# Altium PCB PCB1.PcbDoc
Units mm, origin at the board's own origin, x right, y up, seen from the top; angles counter-clockwise.
Board outline 101.71 x 68.07 mm, 2 copper layers (Top Layer, Bottom Layer); 35 components, 54 nets, 166 pads, 4 vias.
Unrouted connection lines stored in the file: 2.
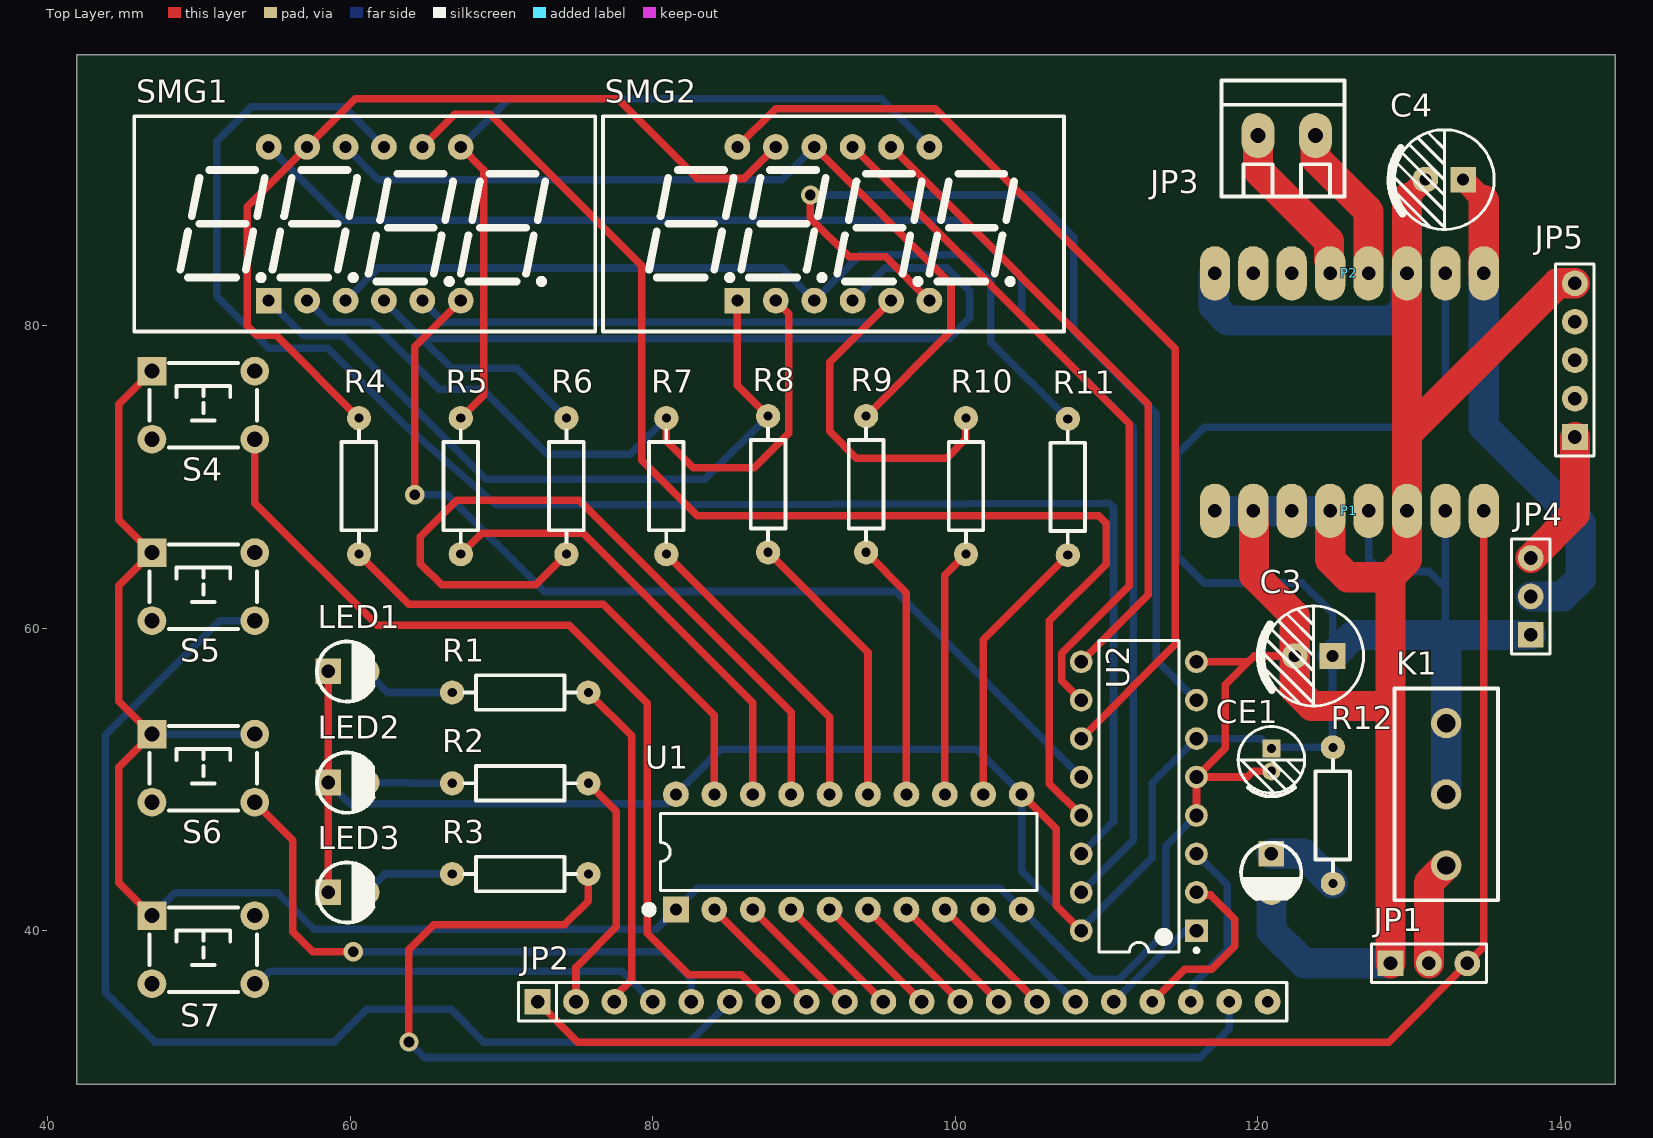
[diagram p0: Top Layer view]
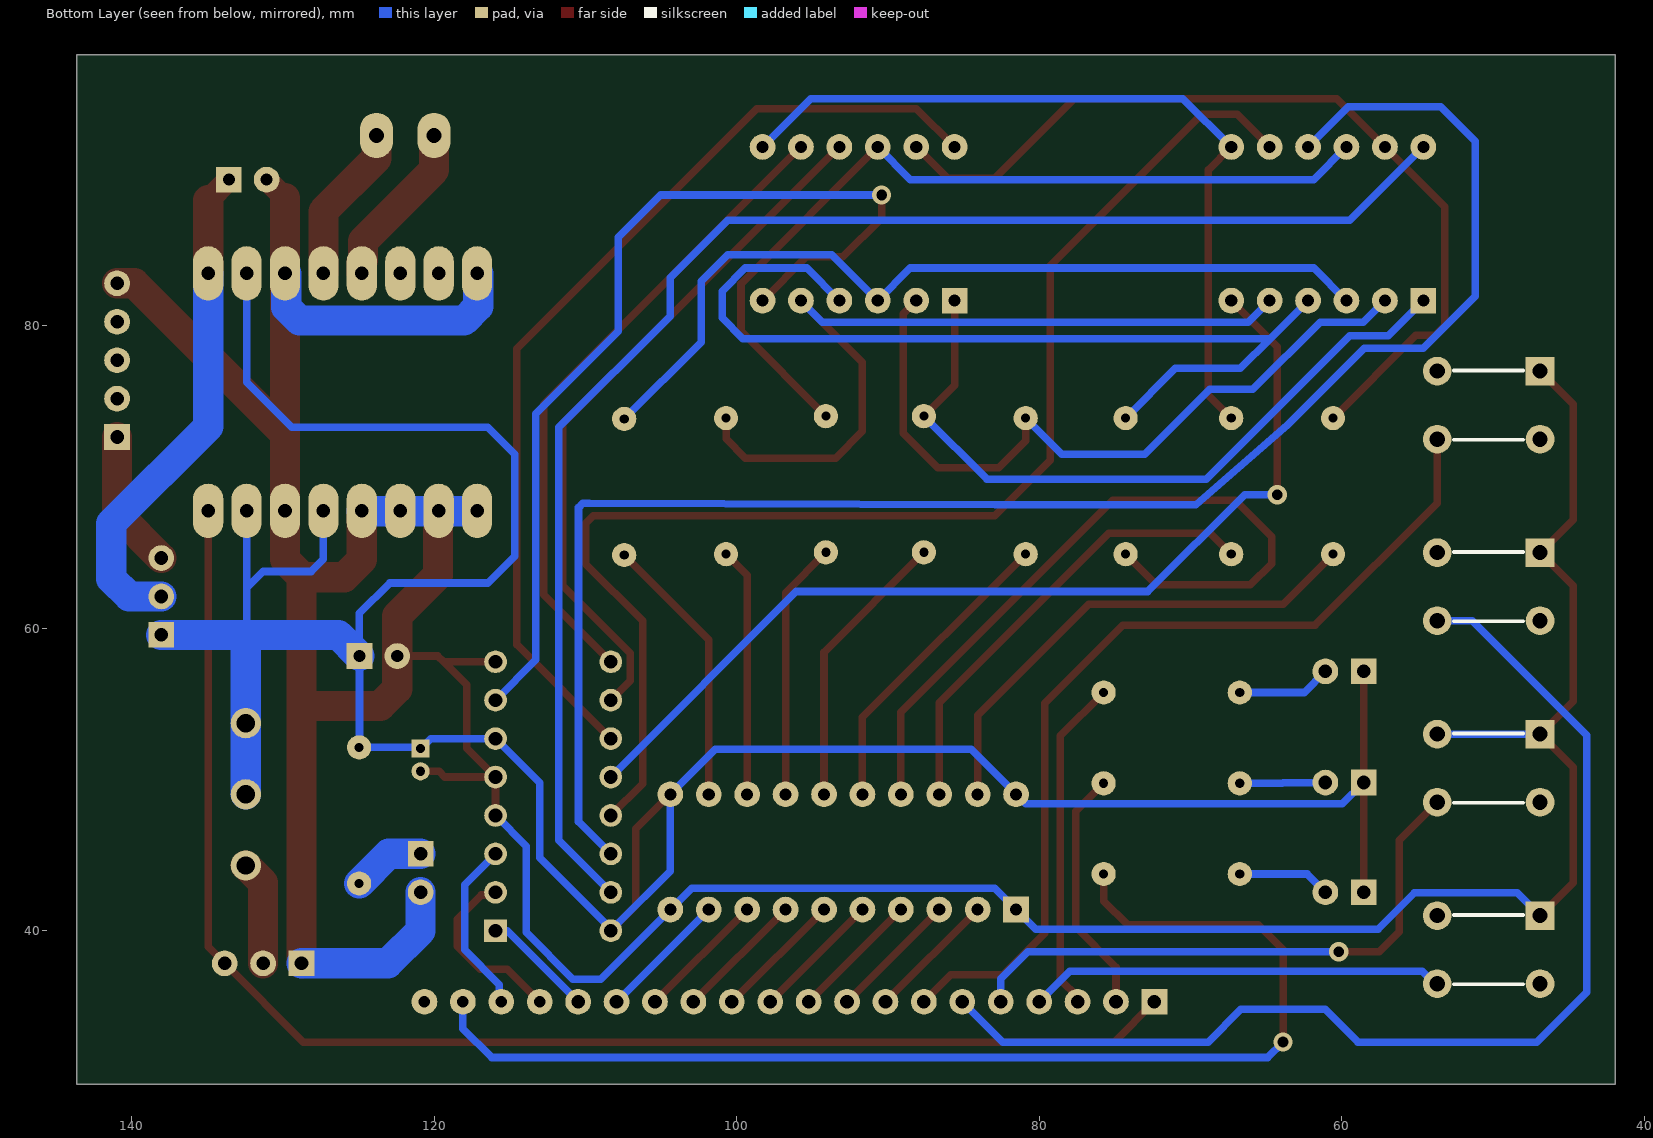
[diagram p1: Bottom Layer view, seen from below]

## Layer stack, top to bottom
Top Solder: solder mask 0.0102, Solder Resist, Dk 3.5
Top Layer: signal copper 0.0356
Dielectric 1: dielectric 0.32, FR-4, Dk 4.8
Bottom Layer: signal copper 0.0356
Bottom Solder: solder mask 0.0102, Solder Resist, Dk 3.5

## Board outline
41.922,29.845 41.922,97.917 143.637,97.917 143.637,29.845

## Design rules (kind name [scope] priority, off if disabled: settings)
Clearance [All] p1: gap=0.3 ignorepadtopadclearanceinfootprint=FALSE
PolygonConnect [All] p1: connectstyle=Relief reliefconductorwidth=0.254 reliefentries=4 polygonreliefangle="90 Angle" airgapwidth=0.254
RoutingCorners [All] p1: cornerstyle=45-Degree minsetback=10 maxsetback=3
RoutingVias [All] p1: holewidth=0.711 width=1.27 viastyle="Through Hole" minholewidth=0.711 minwidth=1.27 maxholewidth=0.711 maxwidth=1.27
SolderMaskExpansion [All] p1: expansion=0.102 istentingtop=FALSE
Width [All] p1: maxlimit=5 minlimit=0.254 preferedwidth=0.5
29 further rules are at their usual default settings.

## Classes and differential pairs
component class Sheet1: CE1 LED1 LED2 LED3 R1 R2 R3 R4 R5 R6 R7 R8 R9 R10 R11 SMG1 SMG2 U1 U2

## Components (designator, comment, footprint, x,y, rotation, side; value= is the part's Value field where it differs from the comment)
C3 "Comment" "CAP 2.5*6.3*11.2 - GD" 123.698,58.166 r180 top
C4 "Comment" "CAP 2.5*6.3*11.2 - GD" 132.334,89.662 r180 top
CE1 "10uF/16V" "CAP 1.5*4*8" 120.904,51.296 r270 top
JP1 "Comment" HDR2.54-LI-3P 131.318,37.846 r0 top
JP2 "Comment" HDR2.54-LI-20P 96.52,35.306 r0 top
JP3 "Comment" KF128-3.81-2P 121.92,92.583 r0 top
JP4 "Comment" HDR2.54-LI-3P 138.049,62.103 r90 top
JP5 "Comment" HDR2.54-LI-5P 140.97,77.724 r90 top
K1 "Comment" SS-12D10 132.461,49.022 r90 top
LED1 "红色" "LED 3MM-B" 59.817,57.15 r0 top
LED2 "红色" "LED 3MM-B" 59.817,49.801 r0 top
LED3 "红色" "LED 3MM-B" 59.817,42.545 r0 top
P1 "Header 8" HDR1X8 117.168,67.763 r0 top
P2 "Header 8" HDR1X8 117.168,83.46 r0 top
R1 "1K" "RS 1/4W" 71.247,55.753 r0 top
R2 "1K" "RS 1/4W" 71.247,49.753 r0 top
R3 "1K" "RS 1/4W" 71.247,43.753 r0 top
R4 "1K" "RS 1/4W" 60.579,69.397 r90 top
R5 "1K" "RS 1/4W" 67.31,69.397 r90 top
R6 "1K" "RS 1/4W" 74.295,69.397 r90 top
R7 "1K" "RS 1/4W" 80.899,69.397 r90 top
R8 "1K" "RS 1/4W" 87.63,69.524 r90 top
R9 "1K" "RS 1/4W" 94.107,69.524 r90 top
R10 "1K" "RS 1/4W" 100.711,69.397 r90 top
R11 "1K" "RS 1/4W" 107.442,69.342 r90 top
R12 "1K" "RS 1/4W" 124.968,47.625 r90 top (schematic designator R11)
S4 "Comment" "SW DIP-6*6*5" 50.292,74.751 r0 top
S5 "Comment" "SW DIP-6*6*5" 50.292,62.751 r0 top
S6 "Comment" "SW DIP-6*6*5" 50.292,50.751 r0 top
S7 "Comment" "SW DIP-6*6*5" 50.292,38.751 r0 top
SMG1 "8041B" "SMG 0.36-4P" 60.96,86.741 r0 top
SMG2 "8041B" "SMG 0.36-4P" 91.948,86.741 r0 top
U1 "SN74HC573" DIP-20 92.964,45.212 r90 top
U2 "74LS138" DIP-16 112.141,48.895 r180 top
? "Comment" "LED 3MM-B" 120.904,43.815 r270 top

## Footprints (in the part's own frame and the unit in brackets; to place one, negate y for a bottom-side part, rotate by r counter-clockwise, add the part's x,y. Pads: shape width x height; smd on the part's side, far side on the other; paste and mask are expansions set on the pad)
"CAP 1.5*4*8" [mm] "脚距1.5mm直径4mm高度8mm"
  rect 1.2x1.2 hole 0.6: 1(-0.75,0)
  round 1.2 hole 0.6: 2(0.75,0)
  silkscreen extent -2.2,-2.2 2.41,2.2, body extent -2,-2 2.02,2, height 8.15
"CAP 2.5*6.3*11.2 - GD" [mm] "脚距2.5mm直径6.3mm高度11.2mm"
  round 1.7 hole 0.8: 2(1.25,0)
  rect 1.7x1.7 hole 0.8: ""(-1.25,0)
  silkscreen extent -3.3,-3.3 3.56,3.3, body extent -3.15,-3.15 3.16,3.15, height 11.34
DIP-16 [mm] "DIP; 16 Leads; Row Spacing 7.62 mm; Pitch 2.54 mm"
  rect 1.5x1.5 hole 0.9: 1(-3.81,8.89)
  round 1.5 hole 0.9: 2(-3.81,6.35) 3(-3.81,3.81) 4(-3.81,1.27) 5(-3.81,-1.27) 6(-3.81,-3.81) 7(-3.81,-6.35) 8(-3.81,-8.89) 9(3.81,-8.89) 10(3.81,-6.35) 11(3.81,-3.81) 12(3.81,-1.27) 13(3.81,1.27) 14(3.81,3.81) 15(3.81,6.35) 16(3.81,8.89)
  silkscreen extent -3.94,-10.3 2.65,10.31, body extent -3.6,-10.28 3.6,10.28, height 5.08
DIP-20 [mm] "26.4*7.6*3.8(长宽高）淘宝ID:黄晶宝石   店铺网址:https://shop463601444.taobao.com"
  rect 1.7x1.7 hole 0.8: 1(-3.81,11.43)
  round 1.7 hole 0.8: 2(-3.81,8.89) 3(-3.81,6.35) 4(-3.81,3.81) 5(-3.81,1.27) 6(-3.81,-1.27) 7(-3.81,-3.81) 8(-3.81,-6.35) 9(-3.81,-8.89) 10(-3.81,-11.43) 11(3.81,-11.43) 12(3.81,-8.89) 13(3.81,-6.35) 14(3.81,-3.81) 15(3.81,-1.27) 16(3.81,1.27) 17(3.81,3.81) 18(3.81,6.35) 19(3.81,8.89) 20(3.81,11.43)
  silkscreen extent -4.06,-12.45 2.54,13.46, body extent -4,-13.2 4,13.2, height 4.5
HDR1X8 [mm] "Connector; Header; 8 Position"
  oval 2x3.6 hole 0.9: 1(0,0) 2(2.54,0) 3(5.08,0) 4(7.62,0) 5(10.16,0) 6(12.7,0) 7(15.24,0) 8(17.78,0)
HDR2.54-LI-3P [mm] "排针，3脚"
  rect 1.7x1.7 hole 0.9: 1(-2.54,0)
  round 1.7 hole 0.9: 2(0,0) 3(2.54,0)
  silkscreen extent -3.81,-1.27 3.81,1.27, body extent -3.81,-1.27 3.81,1.27, height 2.54
HDR2.54-LI-5P [mm] "排针，5脚"
  rect 1.7x1.7 hole 0.9: 1(-5.08,0)
  round 1.7 hole 0.9: 2(-2.54,0) 3(0,0) 4(2.54,0) 5(5.08,0)
  silkscreen extent -6.35,-1.27 6.35,1.27, body extent -6.35,-1.27 6.35,1.27, height 2.54
HDR2.54-LI-20P [mm] "排针，20脚"
  rect 1.7x1.7 hole 0.9: 1(-24.13,0)
  round 1.7 hole 0.9: 2(-21.59,0) 3(-19.05,0) 4(-16.51,0) 5(-13.97,0) 6(-11.43,0) 7(-8.89,0) 8(-6.35,0) 9(-3.81,0) 10(-1.27,0) 11(1.27,0) 12(3.81,0) 13(6.35,0) 14(8.89,0) 15(11.43,0) 16(13.97,0)
  round 1.7 hole 0.762: 17(16.51,0) 18(19.05,0) 19(21.59,0) 20(24.13,0)
  silkscreen extent -25.4,-1.27 25.4,1.27, body extent -25.4,-1.27 25.4,1.27, height 2.54
KF128-3.81-2P [mm] "螺钉式接线端子，脚距3.81mm"
  oval 2.2x3 hole 1: 1(-1.905,0) 2(1.905,0)
  silkscreen extent -4.32,-4.04 3.81,3.63, body extent -4.31,-3.9 3.81,3.5, height 8.55
"LED 3MM-B" [mm] "蓝色3mm直插LED"
  rect 1.7x1.7 hole 0.9: 1(-1.27,0)
  round 1.7 hole 0.9: 2(1.27,0)
  silkscreen extent -2.01,-2 1.72,1.98, body extent -1.95,-1.95 1.64,1.95, height 5.55
"RS 1/4W" [mm] "直插色环电阻，脚距9mm，直径2.3mm"
  round 1.6 hole 0.6: 1(-4.5,0) 2(4.5,0)
  silkscreen extent -3.68,-1.14 3.68,1.14, body extent -4.72,-1.16 4.73,1.16, height 2.32
"SMG 0.36-4P" [mm] "30*14*7.2mm(长宽厚)"
  rect 1.7x1.7 hole 0.8: 1(-6.35,-5.08)
  round 1.7 hole 0.8: 2(-3.81,-5.08) 3(-1.27,-5.08) 4(1.27,-5.08) 5(3.81,-5.08) 6(6.35,-5.08) 7(6.35,5.08) 8(3.81,5.08) 9(1.27,5.08) 10(-1.27,5.08) 11(-3.81,5.08) 12(-6.35,5.08)
  silkscreen extent -15.24,-7.11 15.24,7.11, body extent -15,-7 15,7, height 7.25
SS-12D10 [mm] "脚距3mm      淘宝ID:黄晶宝石"
  round 2 hole 1.2: 1(-4.7,0) 2(0,0) 3(4.7,0)
  silkscreen extent -7,-3.43 7,3.43, body extent -7,-3.1 7,3.1, height 9.65
"SW DIP-6*6*5" [mm] "6*6*5mm"
  rect 1.9x1.9 hole 1: 1(-3.4,2.25)
  round 1.9 hole 1: 2(-3.4,-2.25) 3(3.4,-2.25) 4(3.4,2.25)
  silkscreen extent -3.56,-2.79 3.56,2.79, body extent -4.11,-3 4.11,3, height 4.95

## Part data
CE1: library part CE, "直插电解电容", BOM名称=直插电解电容, 封装库来自淘宝卖家ID：黄晶宝石=其他店铺购入均为盗版假冒封装库, 联系卖家，免费查找封装=唯一出售店铺网址https://shop463601444.taobao.com
LED1 LED2 LED3: library part LED-3MM, "直插3mm LED", BOM名称=插件LED, 封装库来自淘宝卖家 ID：黄晶宝石=其他店铺购入均为假冒，请立即申请退款，本店奖励2~5元现金
P1 P2: "Header, 8-Pin"
R1 R2 R3 R4 R5 R6 R7 R8 R9 R10 R11 R12: library part R-S, "色环电阻", BOM名称=色环电阻, 封装库来自淘宝卖家ID：黄晶宝石=其他店铺购入均为盗版假冒封装库, 联系卖家，免费查找封装=唯一出售店铺网址https://shop463601444.taobao.com
SMG1 SMG2: "0.8寸4位共阳数码管", BOM名称=0.8寸4位共阳, 封装库来自淘宝卖家ID：黄晶宝石=其他店铺购入均为盗版假冒封装库
U1: "OCTAL D-TYPE TRANSPARENT LCH 3SO", 技术支持，联系售后=唯一出售店铺网址https://shop463601444.taobao.com
U2: "3-Line to 8-Line Decoder/Demultiplexer", 技术支持，联系售后=唯一出售店铺网址https://shop463601444.taobao.com

## Via types
v1: diameter 1.27, hole 0.711, Top Layer to Bottom Layer, 4 vias

## Nets (pads, with @x,y where several pads share a name; then routed paths per layer and width w, separated by ;. In a path a pad name is that pad's centre, name@x,y a point inside that pad or via, vN(x,y) a via of type N, cw(c..) or ccw(c..) an arc to the next point about the centre after c; other vN are vias at no path point)
01: ?.1 R12.1 | length 4.9
  Bottom Layer w2: ?.1 123.008,45.085 R12.1
+5: C3. C4. CE1.1 JP4.1 JP4.2 JP4.3 JP5.1 K1.2 K1.3 LED1.1 LED2.1 LED3.1 P1.5 P1.7 P2.7 P2.8 R12.2 U1.11 U1.20 U2.6 U2.16 | length 248.2
  Top Layer w0.5: LED3.1 LED2.1 LED1.1 ; U1.11 106.68,46.736 106.68,41.656 U2.16
  Top Layer w1.5: C4. 134.948,88.298
  Top Layer w2: P2.8 134.948,88.298 ; JP4.3 140.97,67.564 JP5.1
  Bottom Layer w0.5: LED2.1 59.961,48.387 80.899,48.387 U1.20 84.506,51.994 101.422,51.994 U1.11 104.394,43.942 107.887,40.449 108.331,40.449 108.385,40.395 108.594,40.395 113.03,44.831 113.03,49.784 U2.6 120.245,52.705 CE1.1 120.983,52.125 R12.2@124.943,52.125 ; R12.2 R12.2@124.943,52.125 ; P1.5 127.328,64.569 128.143,63.754 131.318,63.754 132.408,62.664 ; P2.7 132.408,76.274 129.413,73.279 116.459,73.279 114.681,71.501 114.681,64.77 116.459,62.992 122.936,62.992 124.948,60.98 C3. 124.943,58.161 R12.2@124.943,52.125 ; 132.408,59.563 132.408,62.664 ; P1.7 132.408,62.664
  Bottom Layer w2: C3. 126.345,59.563 132.408,59.563 JP4.1 ; K1.2 132.461,59.182 132.673,59.394 ; P2.8 134.948,73.332 141.351,66.929 141.351,63.275 140.179,62.103 JP4.2
a: R4.2 SMG1.11 SMG2.11 | length 58.7
  Top Layer w0.5: R4.2 55.101,79.375 53.823,79.375 53.188,80.01 53.188,87.859 SMG1.11 60.35,95.021 77.673,95.021 82.956,89.738 86.055,89.738 SMG2.11
b: R5.2 SMG1.7 SMG2.7 | length 52.8
  Top Layer w0.5: R5.2 68.834,75.421 68.834,90.297 SMG1.7
  Bottom Layer w0.5: SMG1.7 70.51,95.021 95.098,95.021 SMG2.7
c: R6.2 SMG1.4 SMG2.4 | length 63.1
  Bottom Layer w0.5: SMG1.4 64.745,79.146 ; R6.2 71.001,77.191 66.7,77.191 64.745,79.146 ; SMG2.4 95.377,83.82 99.441,83.82 100.965,82.296 100.965,80.518 99.593,79.146 64.745,79.146
d: R7.2 SMG1.2 SMG2.2 | length 49.4
  Top Layer w0.5: R7.2 80.899,72.39 82.677,70.612 86.716,70.612 89.002,72.898 89.002,80.797 SMG2.2
  Bottom Layer w0.5: SMG1.2 58.572,80.239 61.43,80.239 65.875,75.794 68.732,75.794 73.025,71.501 78.503,71.501 R7.2
D1: SMG1.12 U2.15 | length 98.5
  Bottom Layer w0.5: SMG1.12 59.461,86.97 100.609,86.97 104.394,83.185 104.394,80.645 111.76,73.279 111.76,45.974 U2.15
D2: SMG1.9 U2.14 | length 112.1
  Bottom Layer w0.5: SMG1.9 59.563,94.488 53.467,94.488 51.181,92.202 51.181,81.94 54.61,78.511 58.522,78.511 63.574,73.459 69.646,68.161 82.898,68.161 109.757,68.277 110.172,68.277 110.465,67.984 110.465,47.219 U2.14
D3: SMG1.8 U2.13 | length 86.6
  Top Layer w0.5: SMG1.8 66.929,93.98 69.266,93.98 79.273,83.972 79.273,71.12 82.956,67.437 109.474,67.437 109.982,66.929 109.982,64.236 106.231,60.485 106.231,49.725 U2.13
D4: SMG1.6 U2.12 | length 65.9
  Top Layer w0.5: v1(64.262,68.834) 64.262,78.613 SMG1.6
  Bottom Layer w0.5: v1(64.262,68.834) 66.421,68.834 72.822,62.433 96.063,62.433 U2.12
D5: SMG2.12 U2.11 | length 64.9
  Top Layer w0.5: SMG2.12 88.138,94.361 98.679,94.361 114.554,78.486 114.554,58.928 U2.11
D6: SMG2.9 U2.10 | length 46.5
  Top Layer w0.5: SMG2.9 111.506,73.533 111.506,62.814 107.031,58.339 107.031,56.545 U2.10
D7: SMG2.8 U2.9 | length 42.9
  Top Layer w0.5: SMG2.8 112.776,74.803 112.776,62.23 U2.9
D8: SMG2.6 U2.7 | length 64.2
  Top Layer w0.5: v1(90.424,88.646) 90.424,87.122 92.989,84.557 95.402,84.557 SMG2.6
  Bottom Layer w0.5: v1(90.424,88.646) 105.029,88.646 107.823,85.852 107.823,79.629 113.284,74.168 113.284,57.912 U2.7
e: R8.2 SMG1.1 SMG2.1 | length 48.1
  Top Layer w0.5: SMG2.1 85.598,76.056 R8.2
  Bottom Layer w0.5: SMG1.1 56.921,79.35 59.461,79.35 68.961,69.85 83.456,69.85 R8.2
f: R9.2 SMG1.10 SMG2.10 | length 56.6
  Top Layer w0.5: SMG2.10 99.72,82.779 99.72,79.637 R9.2
  Bottom Layer w0.5: SMG1.10 61.849,89.662 88.519,89.662 SMG2.10
g: R10.2 SMG1.5 SMG2.5 | length 54.1
  Top Layer w0.5: SMG2.5 91.694,77.597 91.694,73.025 93.472,71.247 99.441,71.247 100.711,72.517 R10.2
  Bottom Layer w0.5: SMG1.5 66.192,80.239 94.336,80.239 SMG2.5
GND: ?.2 C3.2 C4.2 CE1.2 JP1.1 JP5.5 P1.1 P1.2 P1.3 P1.4 P1.6 P2.1 P2.6 S4.1 S5.1 S6.1 S6.4 S7.1 U1.1 U1.10 U2.4 U2.5 U2.8 | length 286.2
  Top Layer w0.5: S7.1 44.704,43.189 44.704,50.813 S6.1 44.704,55.189 44.704,62.813 S5.1 44.704,67.189 44.704,74.813 S4.1 ; U2.4 U2.5 ; U2.8 119.38,57.785 ; CE1.2 119.685,50.546 119.304,50.165 U2.5 ; C3.2 119.761,58.166 119.38,57.785 ; U2.5 117.856,52.07 117.856,56.261 119.38,57.785
  Top Layer w1.5: 129.868,88.446 C4.2
  Top Layer w2: P1.2 119.708,66.963 119.761,66.911 119.761,63.5 122.448,60.813 C3.2 122.448,55.987 123.571,54.864 128.778,54.864 ; P1.4 124.788,64.545 125.96,63.373 128.697,63.373 128.778,63.454 ; JP1.1 128.778,54.864 ; 129.868,75.732 P2.6 129.868,88.446 ; 129.868,75.732 129.868,72.845 ; JP5.5 139.827,82.804 129.868,72.845 ; 128.778,54.864 128.778,63.454 ; 128.778,63.454 129.868,64.545 P1.6 129.868,72.845
  Bottom Layer w0.5: S7.1 48.411,42.52 55.194,42.52 57.607,40.107 80.239,40.107 U1.1 82.956,42.824 102.972,42.824 U1.10 108.991,36.805 110.83,36.805 113.919,39.894 113.919,45.593 U2.4 ; S6.1 S6.4
  Bottom Layer w2: P2.1 117.092,83.46 117.092,81.28 118.032,80.34 128.905,80.34 129.792,81.227 129.792,83.46 P2.6 ; P1.1 117.168,67.742 P1.2@119.708,67.742 ; P1.2 P1.2@119.708,67.742 ; ?.2 120.904,40.005 123.063,37.846 JP1.1 ; P1.3 P1.3@122.248,67.742 ; P1.4 124.788,67.742 P1.3@122.248,67.742 ; P1.2@119.708,67.742 P1.3@122.248,67.742
h: R11.2 SMG1.3 SMG2.3 | length 57.7
  Bottom Layer w0.5: SMG1.3 61.849,83.82 88.519,83.82 SMG2.3 93.726,84.709 100.584,84.709 102.362,82.931 102.362,78.922 R11.2
NetLED1_2: LED1.2 R1.1 | length 6.2
  Bottom Layer w0.5: LED1.2 62.484,55.753 R1.1
NetLED2_2: LED2.2 R2.1 | length 5.7
  Bottom Layer w0.5: LED2.2 63.881,49.801 63.929,49.753 R2.1
NetLED3_2: LED3.2 R3.1 | length 6.2
  Bottom Layer w0.5: LED3.2 62.295,43.753 R3.1
O1: R4.1 U1.19 | length 33.1
  Top Layer w0.5: R4.1 63.881,61.595 76.733,61.595 84.074,54.254 U1.19
O2: R5.1 U1.18 | length 30.6
  Top Layer w0.5: R5.1 68.682,66.269 75.413,66.269 86.614,55.067 U1.18
O3: R6.1 U1.17 | length 49.6
  Top Layer w0.5: R6.1 72.263,62.865 66.04,62.865 64.643,64.262 64.643,66.04 67.056,68.453 75.133,68.453 89.154,54.432 U1.17
O4: R7.1 U1.16 | length 20.3
  Top Layer w0.5: R7.1 91.694,54.102 U1.16
O5: R8.1 U1.15 | length 18.7
  Top Layer w0.5: R8.1 94.234,58.42 U1.15
O6: R9.1 U1.14 | length 17.1
  Top Layer w0.5: R9.1 96.774,62.357 U1.14
O7: R10.1 U1.13 | length 16.5
  Top Layer w0.5: U1.13 99.314,63.5 R10.1
O8: R11.1 U1.12 | length 18.1
  Top Layer w0.5: U1.12 101.854,59.254 R11.1
out+: JP3.2 P2.5 | length 10.6
  Top Layer w2: JP3.2 123.825,91.059 127.328,87.556 P2.5
out-: JP3.1 P2.4 | length 11.1
  Top Layer w2: JP3.1 120.015,90.297 124.712,85.6 124.712,84.336 124.788,84.26 P2.4
PB0: JP2.5 S6.3 | length 38.8
  Top Layer w0.5: S6.3 56.21,45.983 56.21,39.929 57.531,38.608 v1(60.198,38.608)
  Bottom Layer w0.5: v1(60.198,38.608) 80.772,38.608 82.55,36.83 JP2.5
PB1: JP2.6 S5.3 | length 75.5
  Bottom Layer w0.5: S5.3 51.382,60.501 43.815,52.934 43.815,35.941 47.117,32.639 58.928,32.639 61.087,34.798 66.675,34.798 68.834,32.639 82.423,32.639 JP2.6
PB2: JP2.7 S4.3 | length 60.7
  Top Layer w0.5: S4.3 53.692,68.279 61.773,60.198 74.473,60.198 79.629,55.042 79.629,39.853 82.398,37.084 85.852,37.084 JP2.7
PB3: JP2.8 U1.2 | length 8.6
  Top Layer w0.5: U1.2 JP2.8
PB4: JP2.9 U1.3 | length 8.6
  Top Layer w0.5: U1.3 JP2.9
PB5: JP2.10 U1.4 | length 8.6
  Top Layer w0.5: U1.4 JP2.10
PB6: JP2.11 U1.5 | length 8.6
  Top Layer w0.5: U1.5 JP2.11
PB7: JP2.12 U1.6 | length 8.6
  Top Layer w0.5: U1.6 JP2.12
PB8: JP2.13 U1.7 | length 8.6
  Top Layer w0.5: U1.7 JP2.13
PB9: JP2.14 U1.8 | length 8.6
  Top Layer w0.5: U1.8 JP2.14
PB10: JP2.15 U1.9 | length 8.6
  Bottom Layer w0.5: U1.9 JP2.15
PB11: JP2.16 U2.1 | length 7.4
  Bottom Layer w0.5: JP2.16 115.189,40.005 U2.1
PB12: JP2.17 U2.2 | length 12
  Top Layer w0.5: JP2.17 115.189,37.465 116.967,37.465 118.491,38.989 118.491,40.767 116.893,42.365 116.131,42.365 U2.2
PB13: JP2.18 U2.3 | length 11.6
  Bottom Layer w0.5: JP2.18 115.693,35.429 115.693,36.445 117.983,38.735 117.983,43.053 U2.3
PB14: 
PB15: JP2.20
PC6: JP2.4 S7.3 | length 27.5
  Bottom Layer w0.5: S7.3 53.848,36.501 54.685,37.338 77.978,37.338 JP2.4
PC7: JP2.3 R1.2 | length 22.1
  Top Layer w0.5: R1.2 78.613,52.887 78.613,36.774 77.47,35.631 JP2.3
PC8: JP2.2 R2.2 | length 16.3
  Top Layer w0.5: JP2.2 74.93,37.592 77.597,40.259 77.597,47.903 R2.2
PC9: JP2.19 R3.2 | length 78.3
  Top Layer w0.5: v1(63.881,32.639) 63.881,38.735 65.532,40.386 74.168,40.386 75.747,41.965 R3.2
  Bottom Layer w0.5: v1(63.881,32.639) 64.897,31.623 116.205,31.623 118.11,33.528 JP2.19
PWM: JP1.3 JP2.1 P1.8 | length 95.1
  Top Layer w0.5: JP2.1 75.057,32.639 128.651,32.639 JP1.3 134.948,38.936 P1.8
VCC: JP1.2 K1.1 | length 6.9
  Top Layer w2: JP1.2 131.318,43.179 K1.1
pads on no net: JP5.2 JP5.3 JP5.4 P2.2 P2.3 S4.2 S4.4 S5.2 S5.4 S6.2 S7.2 S7.4

## Silkscreen, mask and mechanical layers (free items; w line width, h text height)
Mechanical 1:
  the board outline again, w0.254